# Altium PCB FPGA_interface_ver2.PcbDoc (part 1 of 2)
Units mil, origin at the board's own origin, x right, y up, seen from the top; angles counter-clockwise.
Board outline 4407 x 9659 mil, 4 copper layers (Top Layer, Ground Plane Top, Ground Plane Bottom, Bottom Layer); 18 components, 181 nets, 968 pads, 2724 vias.
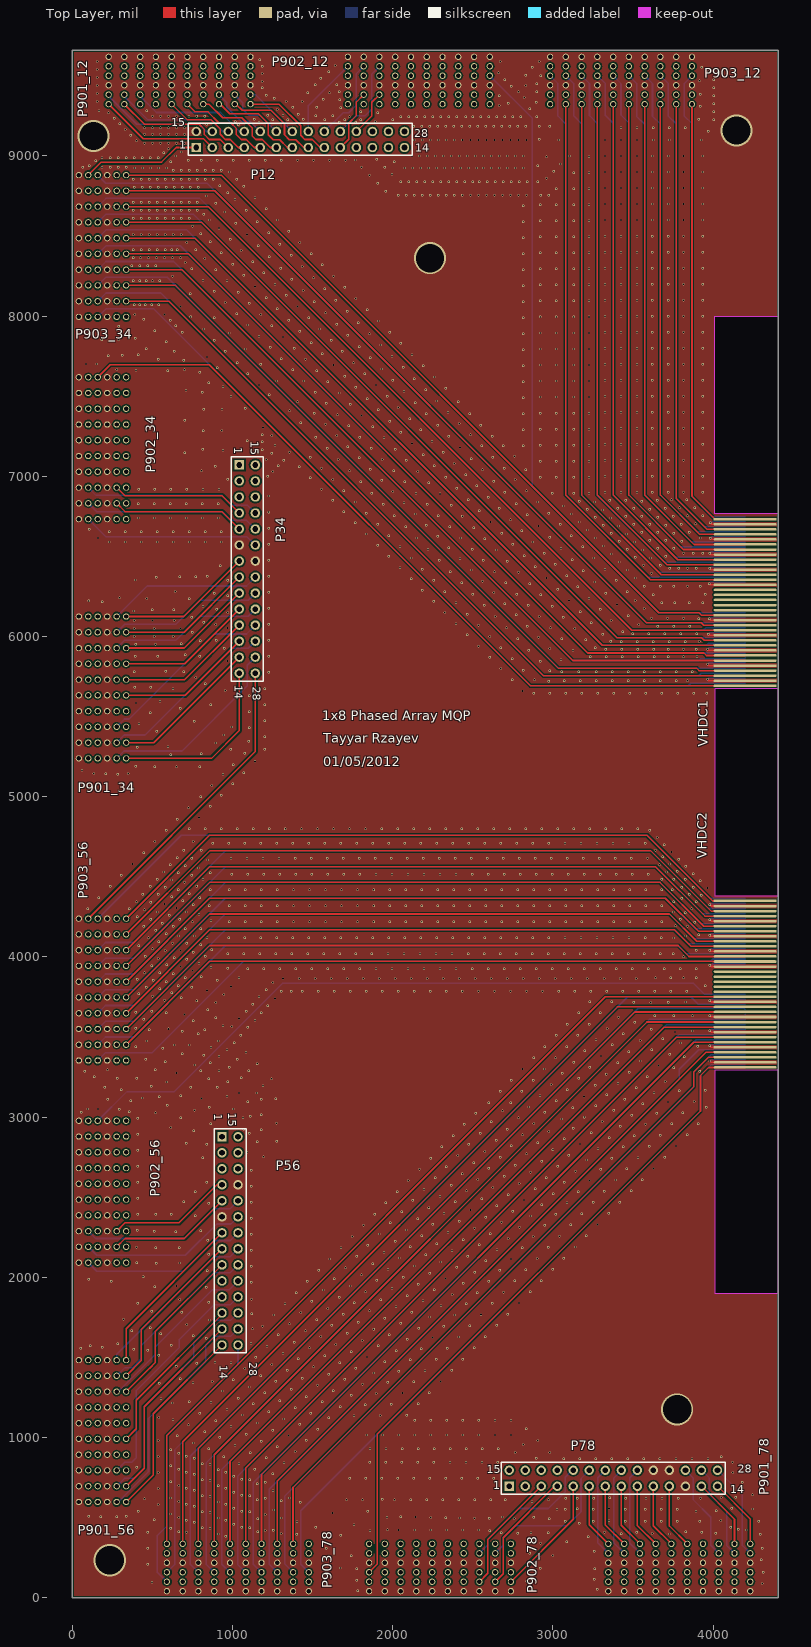
[diagram p0: Top Layer view]
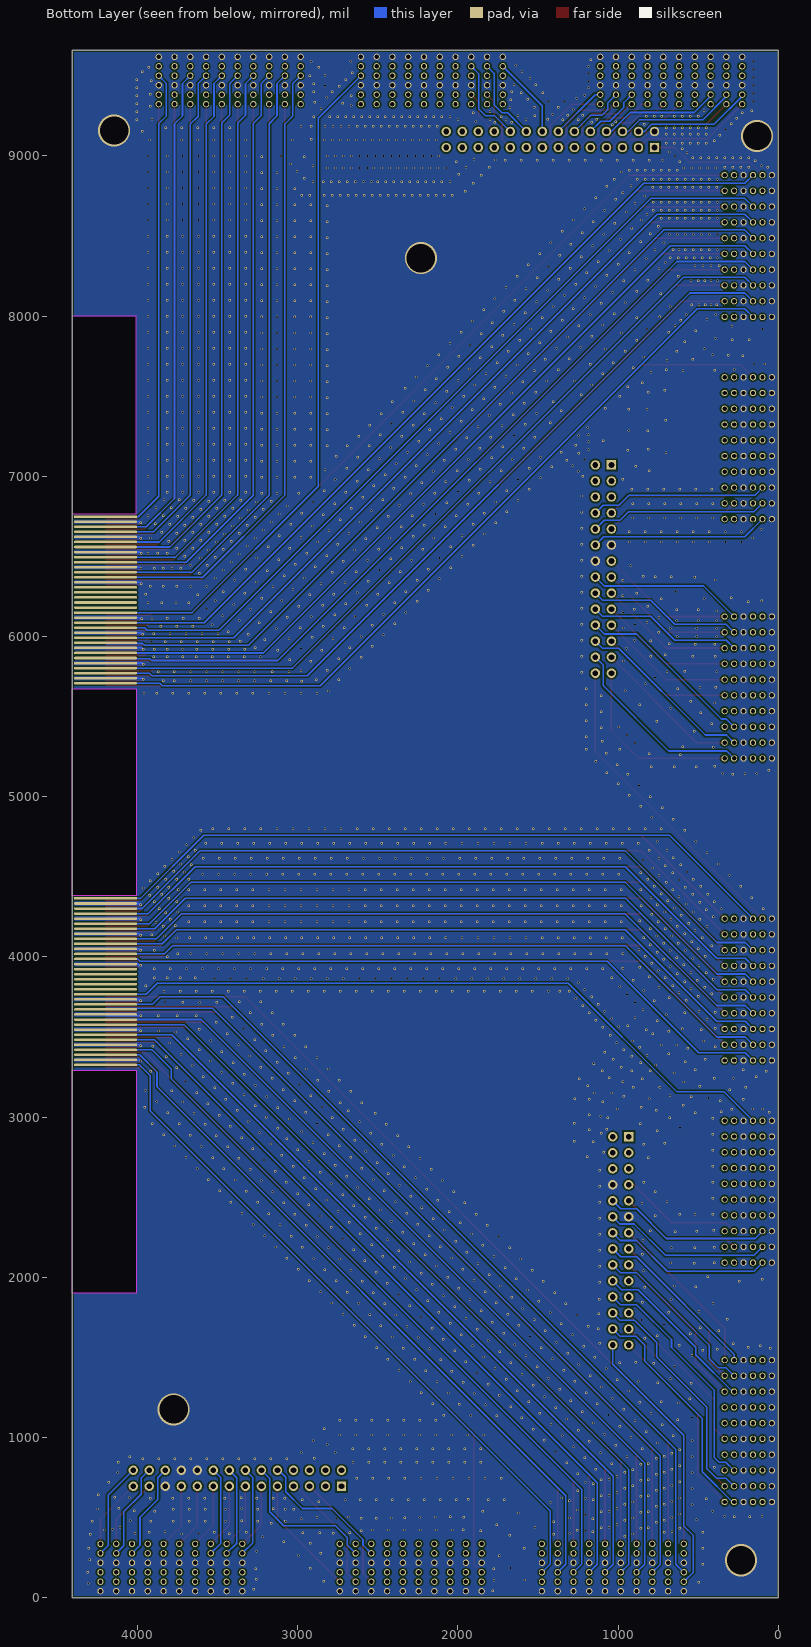
[diagram p1: Bottom Layer view, seen from below]
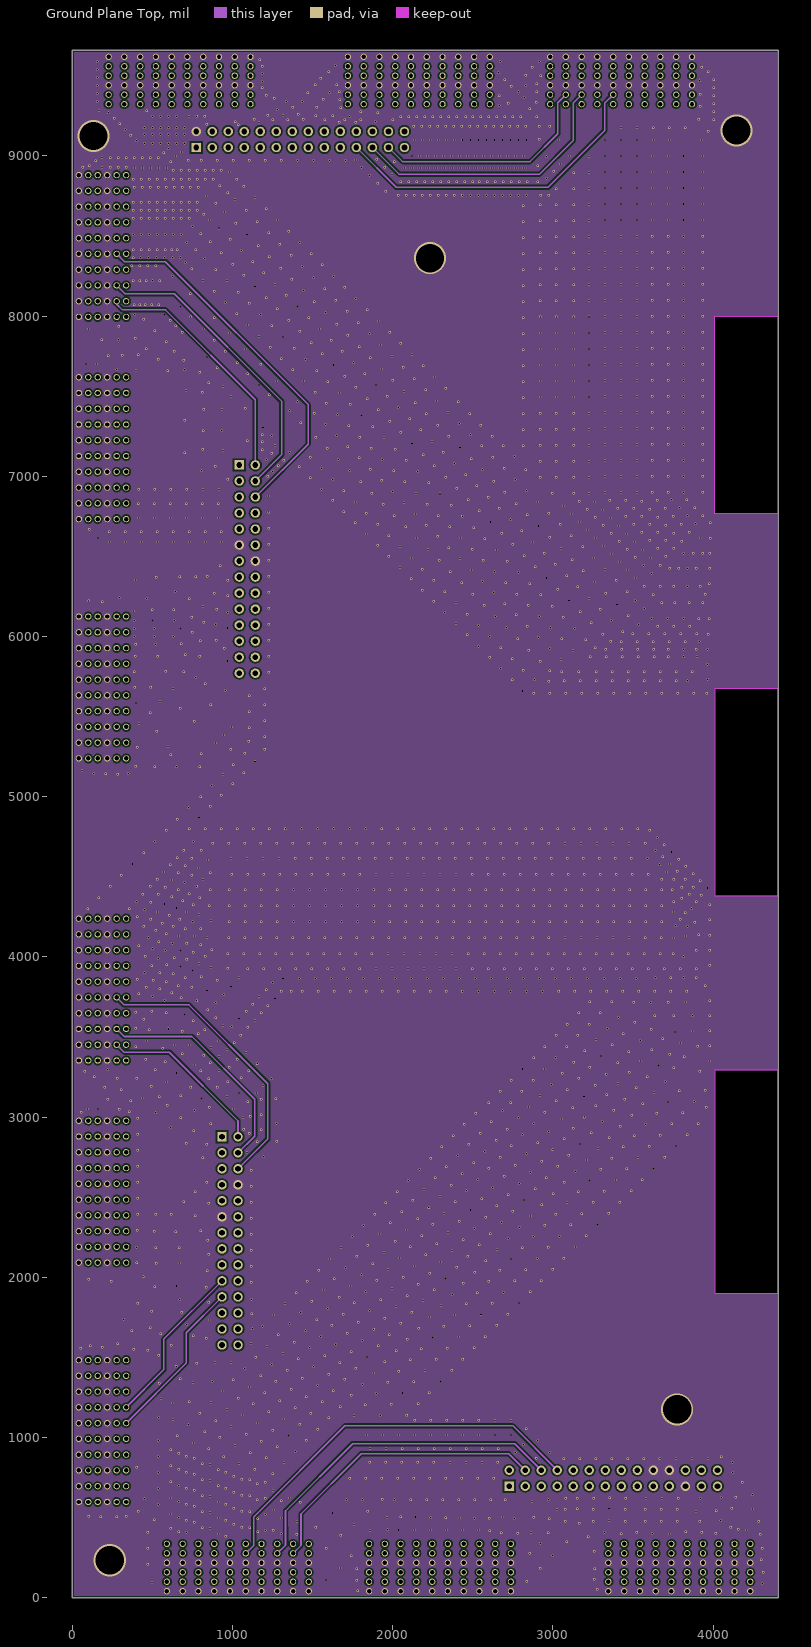
[diagram p2: Ground Plane Top]
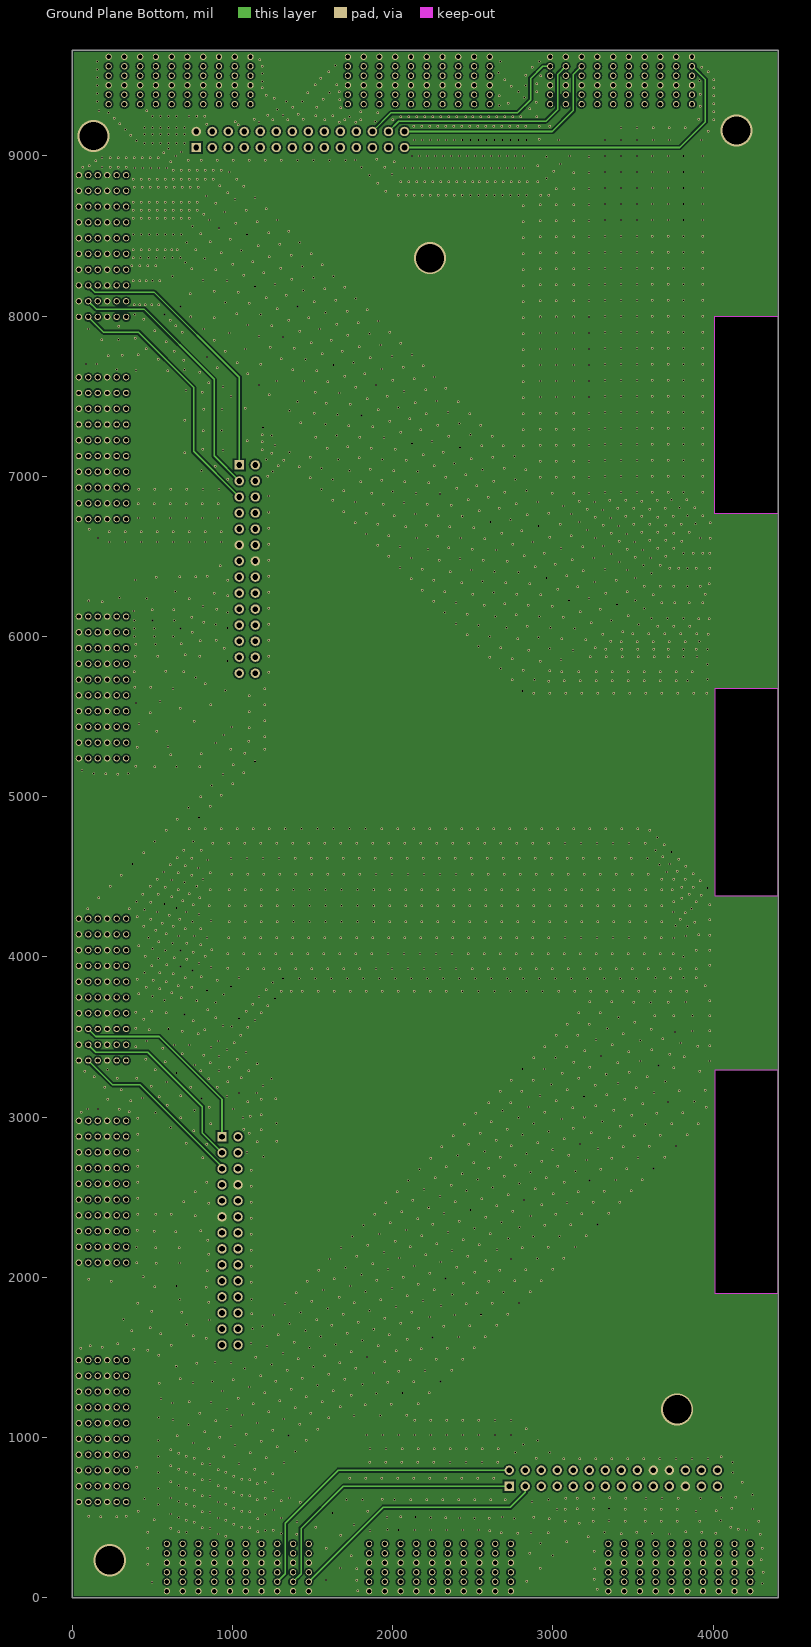
[diagram p3: Ground Plane Bottom]

## Layer stack, top to bottom
Top Layer: signal copper 1.4
Dielectric: core 12.6, FR-4, Dk 4.8
Ground Plane Top: signal copper 1.4
Dielectric: prepreg 12.6, FR-4, Dk 4.8
Ground Plane Bottom: signal copper 1.4
Dielectric: core 12.6, FR-4, Dk 4.8
Bottom Layer: signal copper 1.4

## Board outline
0,0 4407,0 4407,9659 0,9659
cut-out: 4010,6767 4010,8000 4407,8000 4407,6767
cut-out: 4407,5674 4010,5674 4010,4383 4407,4383
cut-out: 4407,3291 4010,3291 4010,1901 4407,1901

## Design rules (kind name [scope] priority, off if disabled: settings)
Clearance [All] p1: gap=10
PolygonConnect [All] p1: connectstyle=Direct reliefconductorwidth=10 reliefentries=4 polygonreliefangle="90 Angle"
RoutingVias [All] p1: holewidth=28 width=50 viastyle="Through Hole" minholewidth=28 minwidth=50 maxholewidth=28 maxwidth=50
SilkscreenOverComponentPads [All] p1: minsilkscreentomaskgap=10
SolderMaskExpansion [All] p1: expansion=4
Width [All] p1: maxlimit=10 minlimit=10 preferedwidth=10
27 further rules are at their usual default settings.

## Classes and differential pairs
component class Ch7and8: P78 P901_78 P902_78 P903_78
component class Ch5and6: P56 P901_56 P902_56 P903_56
component class Ch3and4: P34 P901_34 P902_34 P903_34
component class Ch1and2: P12 P901_12 P902_12 P903_12
component class FPGA_interface: VHDC1 VHDC2

## Components (designator, comment, footprint, x,y, rotation, side; value= is the part's Value field where it differs from the comment)
P12 "Header 14X2A" HDR2X14_CEN 773,9053 r0 top
P34 "Header 14X2A" HDR2X14_CEN 1042,7071 r270 top
P56 "Header 14X2A" HDR2X14_CEN 934,2877 r270 top
P78 "Header 14X2A" HDR2X14_CEN 2727,695 r0 top
P901_12 "P900_Header" P900_header 226,9619 r0 top
P901_34 "P900_Header" P900_header 40,5239 r90 top
P901_56 "P900_Header" P900_header 40,597 r90 top
P901_78 "P900_Header" P900_header 4231.83,40 r180 top
P902_12 "P900_Header" P900_header 1720,9619 r0 top
P902_34 "P900_Header" P900_header 40,6733 r90 top
P902_56 "P900_Header" P900_header 40,2091 r90 top
P902_78 "P900_Header" P900_header 2737.83,40 r180 top
P903_12 "P900_Header" P900_header 2982,9619 r0 top
P903_34 "P900_Header" P900_header 40,7995 r90 top
P903_56 "P900_Header" P900_header 40,3353 r90 top
P903_78 "P900_Header" P900_header 1475.83,40 r180 top
VHDC1 "Component_1" "VHDCP-68-01-M-EM: PLUG" 4200,6732 r270 top
VHDC2 "Component_1" "VHDCP-68-01-M-EM: PLUG" 4200,4349 r270 top

## Footprints (in the part's own frame and the unit in brackets; to place one, negate y for a bottom-side part, rotate by r counter-clockwise, add the part's x,y. Pads: shape width x height; smd on the part's side, far side on the other; paste and mask are expansions set on the pad)
HDR2X14_CEN [mm] "Connector; Header; 14x2 Position"
  rect 1.5x1.5 hole 0.9: 1(0,0)
  round 1.5 hole 0.9: 2(2.54,0) 3(5.08,0) 4(7.62,0) 5(10.16,0) 6(12.7,0) 7(15.24,0) 8(17.78,0) 9(20.32,0) 10(22.86,0) 11(25.4,0) 12(27.94,0) 13(30.48,0) 14(33.02,0) 15(0,2.54) 16(2.54,2.54) 17(5.08,2.54) 18(7.62,2.54) 19(10.16,2.54) 20(12.7,2.54) 21(15.24,2.54) 22(17.78,2.54) 23(20.32,2.54) 24(22.86,2.54) 25(25.4,2.54) 26(27.94,2.54) 27(30.48,2.54) 28(33.02,2.54)
  silkscreen extent -1.27,-1.27 34.29,3.81
P900_header [mm]
  round 1 hole 0.7: A1(0,-7.5) A2(2.5,-7.5) A3(5,-7.5) A4(7.5,-7.5) A5(10,-7.5) A6(12.5,-7.5) A7(15,-7.5) A8(17.5,-7.5) A9(20,-7.5) A10(22.5,-7.5) B1(0,-6) B2(2.5,-6) B3(5,-6) B4(7.5,-6) B5(10,-6) B6(12.5,-6) B7(15,-6) B8(17.5,-6) B9(20,-6) B10(22.5,-6) BG1(0,-4.5) BG2(2.5,-4.5) BG3(5,-4.5) BG4(7.5,-4.5) BG5(10,-4.5) BG6(12.5,-4.5) BG7(15,-4.5) BG8(17.5,-4.5) BG9(20,-4.5) BG10(22.5,-4.5) C1(0,-3) C2(2.5,-3) C3(5,-3) C4(7.5,-3) C5(10,-3) C6(12.5,-3) C7(15,-3) C8(17.5,-3) C9(20,-3) C10(22.5,-3) D1(0,-1.5) D2(2.5,-1.5) D3(5,-1.5) D4(7.5,-1.5) D5(10,-1.5) D6(12.5,-1.5) D7(15,-1.5) D8(17.5,-1.5) D9(20,-1.5) D10(22.5,-1.5) DG1(0,0) DG2(2.5,0) DG3(5,0) DG4(7.5,0) DG5(10,0) DG6(12.5,0) DG7(15,0) DG8(17.5,0) DG9(20,0) DG10(22.5,0)
"VHDCP-68-01-M-EM: PLUG" [mm]
  rect 0.4x10 smd: A1(0,0) A10(7.2,0) A20(15.2,0) A30(23.2,0)
  oval 0.4x10 smd: A2(0.8,0) A3(1.6,0) A4(2.4,0) A5(3.2,0) A6(4,0) A7(4.8,0) A8(5.6,0) A9(6.4,0) A11(8,0) A12(8.8,0) A13(9.6,0) A14(10.4,0) A15(11.2,0) A16(12,0) A17(12.8,0) A18(13.6,0) A19(14.4,0) A21(16,0) A22(16.8,0) A23(17.6,0) A24(18.4,0) A25(19.2,0) A26(20,0) A27(20.8,0) A28(21.6,0) A29(22.4,0) A31(24,0) A32(24.8,0) A33(25.6,0) A34(26.4,0)
  rect 0.4x10 smd far side: B1(-0.4,0) B10(6.8,0) B20(14.8,0) B30(22.8,0)
  oval 0.4x10 smd far side: B2(0.4,0) B3(1.2,0) B4(2,0) B5(2.8,0) B6(3.6,0) B7(4.4,0) B8(5.2,0) B9(6,0) B11(7.6,0) B12(8.4,0) B13(9.2,0) B14(10,0) B15(10.8,0) B16(11.6,0) B17(12.4,0) B18(13.2,0) B19(14,0) B21(15.6,0) B22(16.4,0) B23(17.2,0) B24(18,0) B25(18.8,0) B26(19.6,0) B27(20.4,0) B28(21.2,0) B29(22,0) B31(23.6,0) B32(24.4,0) B33(25.2,0) B34(26,0)

## Part data
P12 P34 P56 P78: "Header, 14-Pin, Dual row"
VHDC1 VHDC2: "VHDC_connector"

## Via types
v1: diameter 15, hole 10, Top Layer to Bottom Layer, 2719 vias
v2: diameter 200, hole 177, Top Layer to Bottom Layer, 5 vias

## Nets (pads, with @x,y where several pads share a name; then routed paths per layer and width w, separated by ;. In a path a pad name is that pad's centre, name@x,y a point inside that pad or via, vN(x,y) a via of type N, cw(c..) or ccw(c..) an arc to the next point about the centre after c; other vN are vias at no path point)
3V_CLK_12: P12.16 P901_12.B1 | length 747.8
  Bottom Layer w10: P901_12.B1@226,9382.78 226,9373.1 401.57,9197.53 791.44,9197.53 835.97,9153 P12.16@873,9153
3V_CLK_34: P34.27 P901_34.B1 | length 1203.1
  Bottom Layer w10: P901_34.B1@276.22,5239 322.22,5285 685,5285 1092,5692 1092,5821 P34.27@1142,5871
3V_CLK_56: P56.27 P901_56.B1 | length 1458.1
  Bottom Layer w10: P901_56.B1@276.22,597 285.9,597 475,786.1 475,1118 833,1476 833,1576 889.47,1632.47 989.47,1632.47 P56.27@1034,1677
3V_CLK_78: P78.28 P901_78.B1 | length 604.6
  Bottom Layer w10: P78.28@4027,796 4183,640 4183,325.05 P901_78.B1@4231.83,276.22
ADC12_A_RANGE: P903_12.C10 VHDC1.B1 | length 3050.3
  Bottom Layer w10: P903_12.C10@3867.83,9500.89 3820,9453.06 3820,9250 3867.83,9202.17 3867.83,6875.17 3995.25,6747.75 VHDC1.B1@4200,6747.75
ADC12_B_RANGE: P902_12.C10 VHDC1.B20 | length 4328.1
  Bottom Layer w10: P902_12.C10@2605.83,9500.89 2872,9234.72 2872,6937.55 3660.23,6149.32 VHDC1.B20@4200,6149.32
ADC12_CLK: P903_12.A10 VHDC1.A1 | length 2840
  Top Layer w10: P903_12.A10@3867.83,9323.72 3867.83,6875.17 4011,6732 VHDC1.A1@4200,6732
ADC12_D0: P903_12.C1 VHDC1.B13 | length 3990.8
  Bottom Layer w10: P903_12.C1@2982,9500.89 3031.02,9451.87 3031.02,9248.98 3080.43,9199.57 3080.43,6883 3593.63,6369.79 VHDC1.B13@4200,6369.79
ADC12_D1: P903_12.A2 VHDC1.A13 | length 3779.4
  Top Layer w10: P903_12.A2@3080.43,9323.72 3080.43,6883 3609.38,6354.05 VHDC1.A13@4200,6354.05
ADC12_D2: P903_12.C2 VHDC1.B12 | length 3879.3
  Bottom Layer w10: P903_12.C2@3080.43,9500.89 3129.45,9451.87 3129.45,9250.55 3178.85,9201.15 3178.85,6883 3660.56,6401.29 VHDC1.B12@4200,6401.29
ADC12_D3: P903_12.A3 VHDC1.A12 | length 3667.9
  Top Layer w10: P903_12.A3@3178.85,9323.72 3178.85,6883 3676.31,6385.54 VHDC1.A12@4200,6385.54
ADC12_D4: P903_12.C3 VHDC1.B10 | length 3755
  Bottom Layer w10: P903_12.C3@3178.85,9500.89 3227.87,9451.87 3227.87,9252.13 3277.28,9202.72 3277.28,6882.72 3695.72,6464.28 VHDC1.B10@4200,6464.28
ADC12_D5: P903_12.A4 VHDC1.A10 | length 3543.4
  Top Layer w10: P903_12.A4@3277.28,9323.72 3277.28,6883 3711.74,6448.54 VHDC1.A10@4200,6448.54
ADC12_D6: P903_12.C4 VHDC1.B9 | length 3643.4
  Bottom Layer w10: P903_12.C4@3277.28,9500.89 3326.3,9451.87 3326.3,9253.7 3375.7,9204.3 3375.7,6883 3762.92,6495.78 VHDC1.B9@4200,6495.78
ADC12_D7: P903_12.A5 VHDC1.A9 | length 3431.9
  Top Layer w10: P903_12.A5@3375.7,9323.72 3375.7,6883 3778.67,6480.03 VHDC1.A9@4200,6480.03
ADC12_D8: P903_12.C5 VHDC1.B7 | length 3518.8
  Bottom Layer w10: P903_12.C5@3375.7,9500.89 3424.72,9451.87 3424.72,9255.28 3474.13,9205.87 3474.13,6883 3798.35,6558.77 VHDC1.B7@4200,6558.77
ADC12_D9: P903_12.A6 VHDC1.A7 | length 3307.4
  Top Layer w10: P903_12.A6@3474.13,9323.72 3474.13,6883 3814.1,6543.02 VHDC1.A7@4200,6543.02
ADC12_D10: P903_12.C6 VHDC1.B6 | length 3407.4
  Bottom Layer w10: P903_12.C6@3474.13,9500.89 3523.15,9451.87 3523.15,9246.85 3572.55,9197.45 3572.55,6883 3865.28,6590.27 VHDC1.B6@4200,6590.27
ADC12_D11: P903_12.A7 VHDC1.A6 | length 3195.9
  Top Layer w10: P903_12.A7@3572.55,9323.72 3572.55,6883 3881.03,6574.52 VHDC1.A6@4200,6574.52
ADC12_D12: P903_12.C7 VHDC1.B4 | length 3282.8
  Bottom Layer w10: P903_12.C7@3572.55,9500.89 3621.58,9451.87 3621.58,9248.42 3670.98,9199.02 3670.98,6883 3900.72,6653.26 VHDC1.B4@4200,6653.26
ADC12_D13: P903_12.A8 VHDC1.A4 | length 3071.4
  Top Layer w10: P903_12.A8@3670.98,9323.72 3670.98,6883 3916.46,6637.51 VHDC1.A4@4200,6637.51
ADC12_D14: P903_12.C8 VHDC1.B3 | length 3183.9
  Bottom Layer w10: P903_12.C8@3670.98,9500.89 3720,9451.87 3720,9250 3769.4,9200.6 3769.4,6861.6 3946.24,6684.76 VHDC1.B3@4200,6684.76
ADC12_D15: P903_12.A9 VHDC1.A3 | length 2972.5
  Top Layer w10: P903_12.A9@3769.4,9323.72 3769.4,6861.6 3961.99,6669.01 VHDC1.A3@4200,6669.01
ADC34_A_RANGE: P903_34.C10 VHDC1.B22 | length 5199.4
  Bottom Layer w10: P903_34.C10@158.11,8880.83 208.94,8830 840,8830 3583.67,6086.33 VHDC1.B22@4200,6086.33
ADC34_B_RANGE: P902_34.C10 VHDC1.A34 | length 4904.5
  Top Layer w10: P902_34.C10@158.11,7618.83 236.28,7697 855,7697 2859.37,5692.63 VHDC1.A34@4200,5692.63
ADC34_CLK: P903_34.A10 VHDC1.A20 | length 5002.7
  Top Layer w10: P903_34.A10@335.28,8880.83 928.73,8880.83 3660.55,6149 3912,6149 3927.43,6133.57 VHDC1.A20@4200,6133.57
ADC34_D0: P903_34.C1 VHDC1.B34 | length 5044.4
  Bottom Layer w10: P903_34.C1@158.11,7995 209.13,8046.02 505.98,8046.02 2859.37,5692.63 3845.16,5692.63 3860.91,5708.38 VHDC1.B34@4200,5708.38
ADC34_D1: P903_34.A2 VHDC1.A32 | length 4833.1
  Top Layer w10: P903_34.A2@335.28,8093.43 602.57,8093.43 2940.38,5755.62 VHDC1.A32@4200,5755.62
ADC34_D2: P903_34.C2 VHDC1.B32 | length 5059
  Bottom Layer w10: P903_34.C2@158.11,8093.43 209.13,8144.45 551.55,8144.45 2940.38,5755.62 3910.62,5755.62 3926.37,5771.37 VHDC1.B32@4200,5771.37
ADC34_D3: P903_34.A3 VHDC1.A31 | length 4860.8
  Top Layer w10: P903_34.A3@335.28,8191.85 643.34,8191.85 3032.19,5803 3896.14,5803 3912.02,5787.12 VHDC1.A31@4200,5787.12
ADC34_D4: P903_34.C3 VHDC1.B31 | length 5073.7
  Bottom Layer w10: P903_34.C3@158.11,8191.85 209.13,8242.87 592.32,8242.87 3032.33,5802.87 VHDC1.B31@4200,5802.87
ADC34_D5: P903_34.A4 VHDC1.A29 | length 4875.5
  Top Layer w10: P903_34.A4@335.28,8290.28 684.11,8290.28 3124.28,5850.11 VHDC1.A29@4200,5850.11
ADC34_D6: P903_34.C4 VHDC1.B29 | length 5101.4
  Bottom Layer w10: P903_34.C4@158.11,8290.28 209.13,8341.3 633.09,8341.3 3124.28,5850.11 3911.38,5850.11 3922.88,5861.61 4195.75,5861.61 VHDC1.B29@4200,5865.86
ADC34_D7: P903_34.A5 VHDC1.A28 | length 4903.2
  Top Layer w10: P903_34.A5@335.28,8388.7 724.88,8388.7 3216.58,5897 3942.6,5897 3957.99,5881.61 VHDC1.A28@4200,5881.61
ADC34_D8: P903_34.C5 VHDC1.B28 | length 5116.1
  Bottom Layer w10: P903_34.C5@158.11,8388.7 209.13,8439.72 673.86,8439.72 3216.23,5897.35 VHDC1.B28@4200,5897.35
ADC34_D9: P903_34.A6 VHDC1.A26 | length 4917.9
  Top Layer w10: P903_34.A6@335.28,8487.13 765.65,8487.13 3308.18,5944.6 VHDC1.A26@4200,5944.6
ADC34_D10: P903_34.C6 VHDC1.B26 | length 5143.8
  Bottom Layer w10: P903_34.C6@158.11,8487.13 209.13,8538.15 714.63,8538.15 3308.18,5944.6 3957.36,5944.6 3968.86,5956.09 4195.75,5956.09 VHDC1.B26@4200,5960.35
ADC34_D11: P903_34.A7 VHDC1.A25 | length 4945.6
  Top Layer w10: P903_34.A7@335.28,8585.55 806.42,8585.55 3399.97,5992 3928,5992 3943.91,5976.09 VHDC1.A25@4200,5976.09
ADC34_D12: P903_34.C7 VHDC1.B25 | length 5158.5
  Bottom Layer w10: P903_34.C7@158.11,8585.55 209.13,8636.58 755.4,8636.58 3400.13,5991.84 VHDC1.B25@4200,5991.84
ADC34_D13: P903_34.A8 VHDC1.A23 | length 4960.3
  Top Layer w10: P903_34.A8@335.28,8683.98 847.19,8683.98 3492.08,6039.09 VHDC1.A23@4200,6039.09
ADC34_D14: P903_34.C8 VHDC1.B23 | length 5186.3
  Bottom Layer w10: P903_34.C8@158.11,8683.98 209.13,8735 796.16,8735 3492.16,6039 3939,6039 3954.83,6054.83 VHDC1.B23@4200,6054.83
ADC34_D15: P903_34.A9 VHDC1.A22 | length 4988
  Top Layer w10: P903_34.A9@335.28,8782.4 887.96,8782.4 3584.36,6086 3926,6086 3941.42,6070.58 VHDC1.A22@4200,6070.58
ADC56_A_RANGE: P903_56.C10 VHDC2.B1 | length 4421.5
  Bottom Layer w10: P903_56.C10@158.11,4238.83 679.28,4760 3587,4760 3982.25,4364.75 VHDC2.B1@4200,4364.75
ADC56_B_RANGE: P902_56.C10 VHDC2.B20 | length 4426.6
  Bottom Layer w10: P902_56.C10@158.11,2976.83 338.28,3157 632,3157 1311,3836 3877,3836 3946.68,3766.32 VHDC2.B20@4200,3766.32
ADC56_CLK: P903_56.A10 VHDC2.A1 | length 4250.8
  Top Layer w10: P903_56.A10@335.28,4238.83 856.45,4760 3587,4760 3998,4349 VHDC2.A1@4200,4349
ADC56_D0: P903_56.C1 VHDC2.B13 | length 4304.4
  Bottom Layer w10: P903_56.C1@158.11,3353 206.13,3401.02 497.02,3401.02 1068,3972 3983.21,3972 3998,3986.79 VHDC2.B13@4200,3986.79
ADC56_D1: P903_56.A2 VHDC2.A13 | length 4081.2
  Top Layer w10: P903_56.A2@335.28,3451.43 856.45,3972.6 3996.45,3972.6 3998,3971.05 VHDC2.A13@4200,3971.05
ADC56_D2: P903_56.C2 VHDC2.B12 | length 4319.5
  Bottom Layer w10: P903_56.C2@158.11,3451.43 206.13,3499.45 383.45,3499.45 954,4070 3782,4070 3833.71,4018.29 VHDC2.B12@4200,4018.29
ADC56_D3: P903_56.A3 VHDC2.A12 | length 4109
  Top Layer w10: P903_56.A3@335.28,3549.85 856.45,4071.02 3780.98,4071.02 3849.46,4002.54 VHDC2.A12@4200,4002.54
ADC56_D4: P903_56.C3 VHDC2.B10 | length 4335.1
  Bottom Layer w10: P903_56.C3@158.11,3549.85 206.13,3597.87 383.87,3597.87 955.45,4169.45 3757.55,4169.45 3845.72,4081.28 VHDC2.B10@4200,4081.28
ADC56_D5: P903_56.A4 VHDC2.A10 | length 4123.6
  Top Layer w10: P903_56.A4@335.28,3648.28 856.45,4169.45 3758.55,4169.45 3862.46,4065.54 VHDC2.A10@4200,4065.54
ADC56_D6: P903_56.C4 VHDC2.B9 | length 4362.9
  Bottom Layer w10: P903_56.C4@158.11,3648.28 206.13,3696.3 383.3,3696.3 955,4268 3727,4268 3882.22,4112.78 VHDC2.B9@4200,4112.78
ADC56_D7: P903_56.A5 VHDC2.A9 | length 4151.4
  Top Layer w10: P903_56.A5@335.28,3746.7 856.45,4267.87 3727.13,4267.87 3897.97,4097.03 VHDC2.A9@4200,4097.03
ADC56_D8: P903_56.C5 VHDC2.B7 | length 4377.5
  Bottom Layer w10: P903_56.C5@158.11,3746.7 206.13,3794.72 382.72,3794.72 954.3,4366.3 3701.7,4366.3 3892.23,4175.77 VHDC2.B7@4200,4175.77
ADC56_D9: P903_56.A6 VHDC2.A7 | length 4166
  Top Layer w10: P903_56.A6@335.28,3845.13 856.45,4366.3 3701.7,4366.3 3907.98,4160.02 VHDC2.A7@4200,4160.02
ADC56_D10: P903_56.C6 VHDC2.B6 | length 4405.2
  Bottom Layer w10: P903_56.C6@158.11,3845.13 206.13,3893.15 383.15,3893.15 954.73,4464.73 3668.27,4464.73 3925.73,4207.27 VHDC2.B6@4200,4207.27
ADC56_D11: P903_56.A7 VHDC2.A6 | length 4193.8
  Top Layer w10: P903_56.A7@335.28,3943.55 856.45,4464.73 3668.27,4464.73 3941.48,4191.52 VHDC2.A6@4200,4191.52
ADC56_D12: P903_56.C7 VHDC2.B4 | length 4419.9
  Bottom Layer w10: P903_56.C7@158.11,3943.55 206.13,3991.58 383.58,3991.58 955.15,4563.15 3640.85,4563.15 3933.74,4270.26 VHDC2.B4@4200,4270.26
ADC56_D13: P903_56.A8 VHDC2.A4 | length 4208.4
  Top Layer w10: P903_56.A8@335.28,4041.98 856.45,4563.15 3640.85,4563.15 3949.49,4254.51 VHDC2.A4@4200,4254.51
ADC56_D14: P903_56.C8 VHDC2.B3 | length 4447.6
  Bottom Layer w10: P903_56.C8@158.11,4041.98 206.13,4090 383,4090 954.58,4661.58 3611.6,4661.58 3971.42,4301.76 VHDC2.B3@4200,4301.76
ADC56_D15: P903_56.A9 VHDC2.A3 | length 4236.2
  Top Layer w10: P903_56.A9@335.28,4140.4 856.45,4661.58 3611.6,4661.58 3987.17,4286.01 VHDC2.A3@4200,4286.01
ADC78_A_RANGE: P903_78.C10 VHDC2.B22 | length 5537.3
  Bottom Layer w10: P903_78.C10@590,158.11 640,208.11 640,924 3467,3751 3860,3751 3907.5,3703.5 3984.91,3703.5 3985.08,3703.33 VHDC2.B22@4200,3703.33
ADC78_B_RANGE: P902_78.C10 VHDC2.A34 | length 4257.9
  Top Layer w10: P902_78.C10@1852,158.11 1902,208.11 1902,1019 3921,3038 3921,3259 3971.63,3309.63 VHDC2.A34@4200,3309.63
ADC78_CLK: P903_78.A10 VHDC2.A20 | length 5422
  Top Layer w10: P903_78.A10@590,335.28 590,1013.55 3327.02,3750.57 VHDC2.A20@4200,3750.57
ADC78_D0: P903_78.C1 VHDC2.B34 | length 4462.3
  Bottom Layer w10: P903_78.C1@1475.83,158.11 1424.98,208.96 1424.98,541.98 3921,3038 3921,3259 3987.38,3325.38 VHDC2.B34@4200,3325.38
ADC78_D1: P903_78.A2 VHDC2.A32 | length 4340.8
  Top Layer w10: P903_78.A2@1377.4,335.28 1377.4,687.4 3878,3188 3878,3279.82 3970.8,3372.62 VHDC2.A32@4200,3372.62
ADC78_D2: P903_78.C2 VHDC2.B32 | length 4566.6
  Bottom Layer w10: P903_78.C2@1377.4,158.11 1326.55,208.96 1326.55,636.55 3879,3189 3879,3280.82 3986.55,3388.37 VHDC2.B32@4200,3388.37
ADC78_D3: P903_78.A3 VHDC2.A31 | length 4422.3
  Top Layer w10: P903_78.A3@1278.98,335.28 1278.98,728.17 3954.92,3404.12 VHDC2.A31@4200,3404.12
ADC78_D4: P903_78.C3 VHDC2.B31 | length 4683.8
  Bottom Layer w10: P903_78.C3@1278.98,158.11 1228.13,208.96 1228.13,677.13 3789,3238 3789,3299 3909.86,3419.86 VHDC2.B31@4200,3419.86
ADC78_D5: P903_78.A4 VHDC2.A29 | length 4570.7
  Top Layer w10: P903_78.A4@1180.55,335.28 1180.55,768.94 3878.72,3467.11 VHDC2.A29@4200,3467.11
ADC78_D6: P903_78.C4 VHDC2.B29 | length 4796.3
  Bottom Layer w10: P903_78.C4@1180.55,158.11 1129.7,208.96 1129.7,717.7 3894.86,3482.86 VHDC2.B29@4200,3482.86
ADC78_D7: P903_78.A5 VHDC2.A28 | length 4706.1
  Top Layer w10: P903_78.A5@1082.13,335.28 1082.13,809.71 3771.03,3498.61 VHDC2.A28@4200,3498.61
ADC78_D8: P903_78.C5 VHDC2.B28 | length 4931.6
  Bottom Layer w10: P903_78.C5@1082.13,158.11 1031.28,208.96 1031.28,758.28 3787.35,3514.35 VHDC2.B28@4200,3514.35
ADC78_D9: P903_78.A6 VHDC2.A26 | length 4854.5
  Top Layer w10: P903_78.A6@983.7,335.28 983.7,850.48 3694.82,3561.6 VHDC2.A26@4200,3561.6
ADC78_D10: P903_78.C6 VHDC2.B26 | length 5080.4
  Bottom Layer w10: P903_78.C6@983.7,158.11 932.85,208.96 932.85,799.85 3710.35,3577.35 VHDC2.B26@4200,3577.35
ADC78_D11: P903_78.A7 VHDC2.A25 | length 4989.8
  Top Layer w10: P903_78.A7@885.27,335.28 885.27,891.25 3587.12,3593.09 VHDC2.A25@4200,3593.09
ADC78_D12: P903_78.C7 VHDC2.B25 | length 5215.7
  Bottom Layer w10: P903_78.C7@885.27,158.11 834.42,208.96 834.42,840.42 3602.84,3608.84 VHDC2.B25@4200,3608.84
ADC78_D13: P903_78.A8 VHDC2.A23 | length 5138.2
  Top Layer w10: P903_78.A8@786.85,335.28 786.85,932.01 3510.92,3656.09 VHDC2.A23@4200,3656.09
ADC78_D14: P903_78.C8 VHDC2.B23 | length 5370.1
  Bottom Layer w10: P903_78.C8@786.85,158.11 736,208.96 736,882 3532.58,3678.58 4193.25,3678.58 VHDC2.B23@4200,3671.83
ADC78_D15: P903_78.A9 VHDC2.A22 | length 5273.6
  Top Layer w10: P903_78.A9@688.42,335.28 688.42,972.78 3403.22,3687.58 VHDC2.A22@4200,3687.58
ADC_CSB12: P12.5 P901_12.A6 | length 589.9
  Top Layer w10: P901_12.A6@718.13,9323.72 766.85,9275 846.28,9275 914.28,9207 989,9207 1024,9172 1024,9133 1054,9103 1085.97,9103 1135.97,9053 P12.5@1173,9053
ADC_CSB34: P34.11 P901_34.A6 | length 847.5
  Top Layer w10: P901_34.A6@335.28,5731.13 702.13,5731.13 P34.11@1042,6071
ADC_CSB56: P56.11 P901_56.A6 | length 1035.9
  Ground Plane Top w10: P901_56.A6@335.28,1089.13 710,1463.85 710,1653 P56.11@934,1877
ADC_CSB78: P78.10 P901_78.A6 | length 407.4
  Top Layer w10: P78.10@3627,696 3627,447.98 P901_78.A6@3739.7,335.28
AVDD12: P12.3 P901_12.A2 | length 778.9
  Top Layer w10: P901_12.A2@324.43,9323.72 450.62,9197.53 791.44,9197.53 824,9164.97 824,9134 855,9103 923,9103 P12.3@973,9053
AVDD34: P34.13 P901_34.A2 | length 927.7
  Top Layer w10: P901_34.A2@335.28,5337.43 508.43,5337.43 P34.13@1042,5871
AVDD56: P56.13 P901_56.A2 | length 1229.6
  Top Layer w10: P901_56.A2@335.28,695.43 448,808.15 448,1191 P56.13@934,1677
AVDD78: P78.13 P901_78.A2 | length 446.2
  Top Layer w10: P78.13@3927,696 4133.4,489.6 P901_78.A2@4133.4,335.28
DIV12_5V: P12.11 P903_12.B5 | length 2046.4
  Ground Plane Top w10: P12.11@1773,9053 2022,8804 2969,8804 3324,9159 3324,9331.08 P903_12.B5@3375.7,9382.78
DIV34_5V: P34.17 P903_34.B5 | length 2299.1
  Ground Plane Top w10: P903_34.B5@276.22,8388.7 324.92,8340 580,8340 1472,7448 1472,7201 P34.17@1142,6871
DIV56_5V: P56.17 P903_56.B5 | length 1775
  Ground Plane Top w10: P903_56.B5@276.22,3746.7 322.92,3700 728,3700 1220,3208 1220,2863 P56.17@1034,2677
DIV78_5V: P78.18 P903_78.B5 | length 2492.9
  Ground Plane Top w10: P903_78.B5@1082.13,276.22 1133,327.09 1133,504 1701,1072 2750,1072 P78.18@3027,795
DRVDD12: P12.2 P901_12.A1 | length 759.1
  Top Layer w10: P901_12.A1@226,9323.72 442.72,9107 819,9107 P12.2@873,9053
DRVDD34: P34.14 P901_34.A1 | length 1136.8
  Top Layer w10: P901_34.A1@335.28,5239 868,5239 1042,5413 P34.14@1042,5771
DRVDD56: P56.14 P901_56.A1 | length 1228
  Top Layer w10: P901_56.A1@335.28,597 504,765.72 504,1147 P56.14@934,1577
DRVDD78: P78.14 P901_78.A1 | length 445.6
  Top Layer w10: P78.14@4027,696 4231.83,491.17 P901_78.A1@4231.83,335.28

## Text inside footprints (layer, text, board x,y; h text height)
P78: Top Overlay "28" at 4155,780 h50; Top Overlay "14" at 4108,650 h50; Top Overlay "1" at 2627,675 h50; Top Overlay "15" at 2587,775 h50